# EAGLE board ARM_board (EAGLE 6.3), part 1 of 3
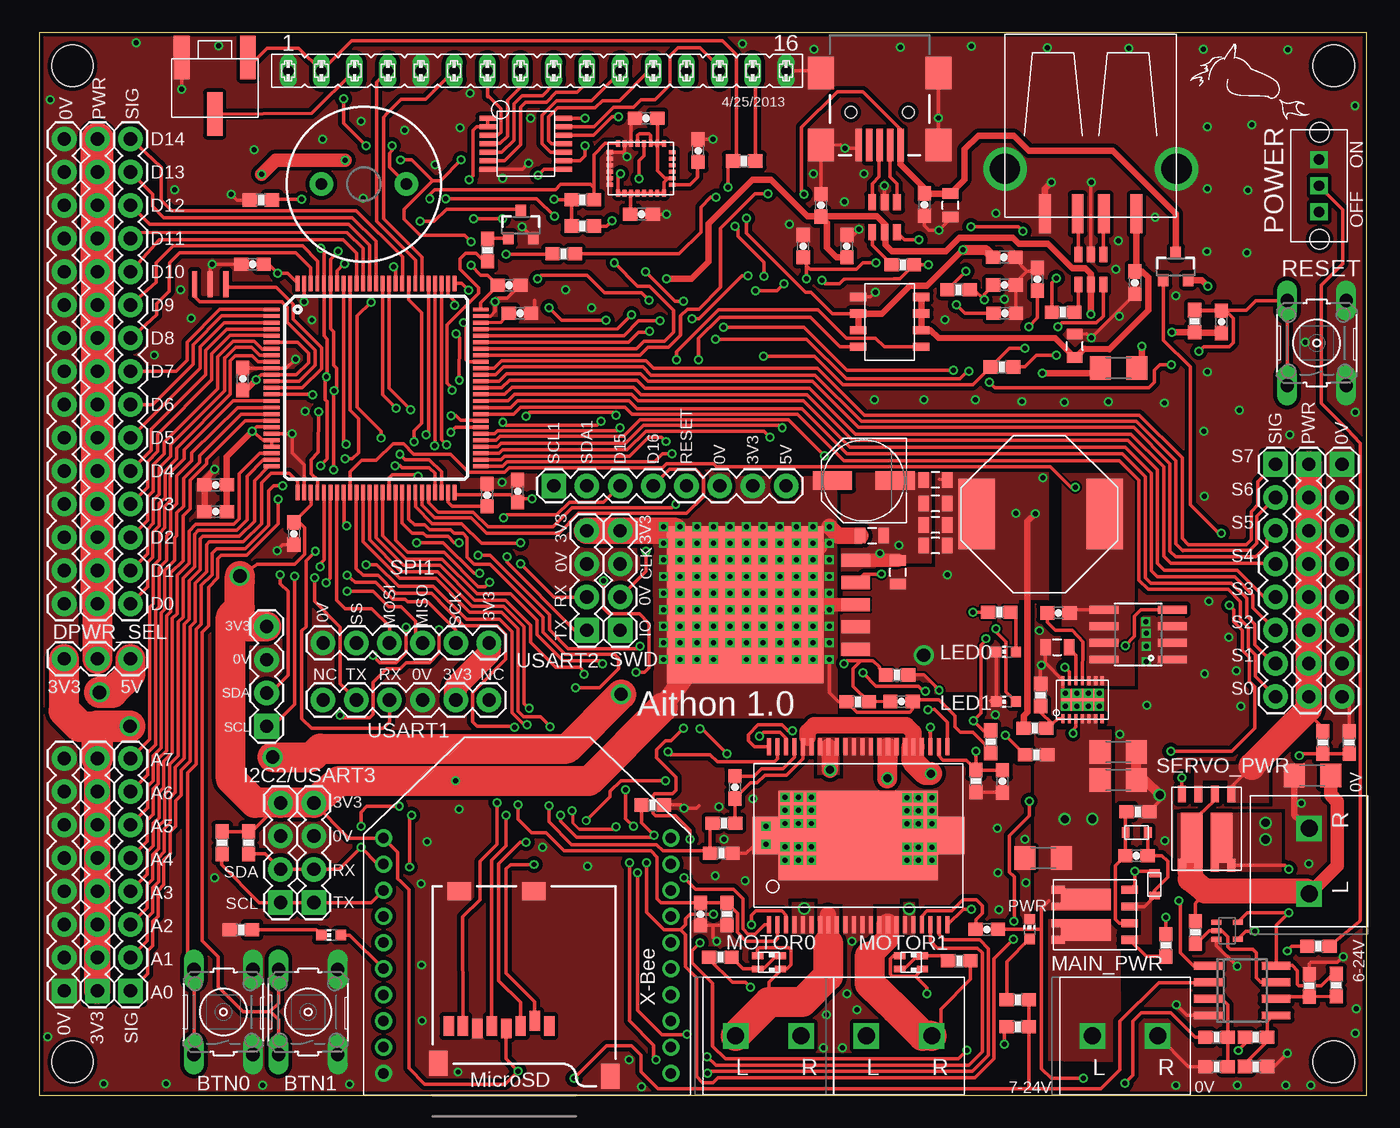
[diagram p0: board, top side]
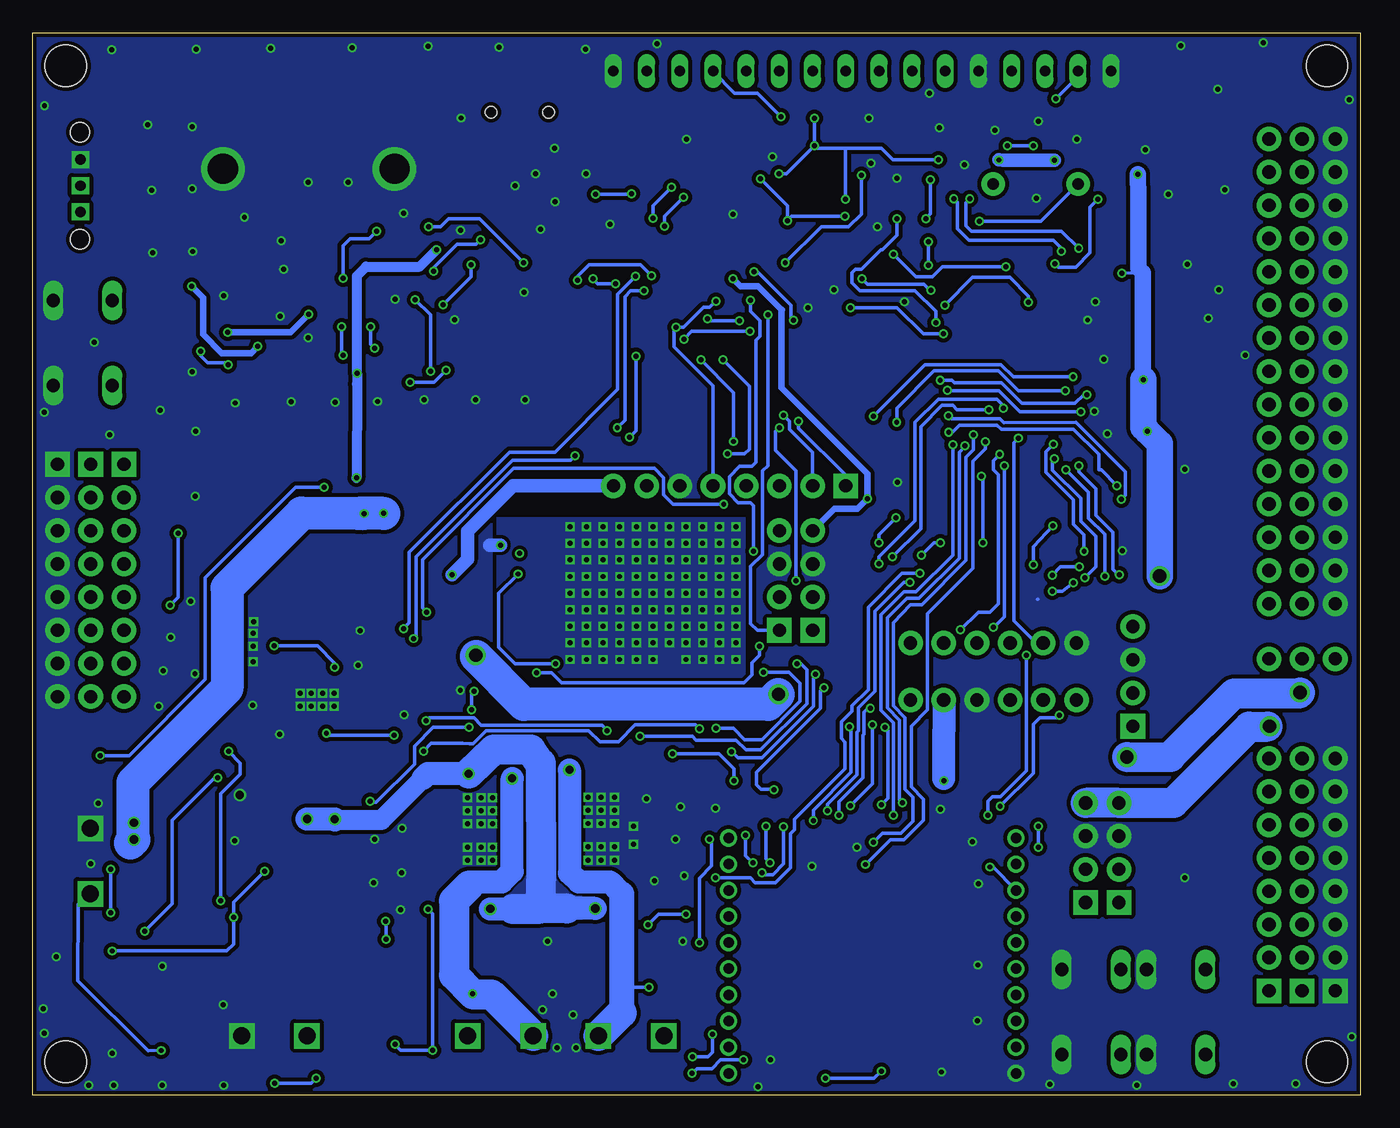
[diagram p1: board, bottom side, seen from below]

Size 101.6 x 81.28 mm. Coordinates in mm from the lower left corner, seen from the top.
Outline: 0,0 101.6,0 101.6,81.28 0,81.28 0,0
Copper layers (1*16): Top 0.035mm / dielectric 1.5mm / Bottom 0.035mm
Design rules "default": minimum track width 6mil, minimum drill 12mil, track to track 6mil, track to pad 6mil, pad to pad 6mil, via to via 6mil, smd to smd 0mil, copper to edge 10mil, drill to drill 10mil, minimum pad ring 10mil, minimum via ring 6mil, stop-mask expansion 2mil, vias tented up to drill 100mil, thermal gap 10mil
Holes 3.17 mm at 2.54,78.74 99.06,78.74 99.06,2.54 2.54,2.54

## Footprints (pad centres in the part's own frame; a part is rotated, then mirrored left to right if it is on the bottom)
B3F-10XX = drill 1.016 long: 1 -3.251,2.261; 2 3.251,2.261; 3 -3.251,-2.261; 4 3.251,-2.261
0805 = smd 0.8 x 1.2: 1 -0.9,0; 2 0.9,0
0603-CAP = smd 1.1 x 1: 1 -0.85,0; 2 0.85,0
1206 = smd 1.6 x 1.8: 1 -1.4,0; 2 1.4,0
PANASONIC_D = smd 3 x 1.4: + 2.4,0; - -2.4,0
1206' = smd 1.6 x 1.8: 1 -0.13,2.54; 2 2.67,2.54
TQFP100 = smd 1.2 x 0.3: 1 -8,6; 2 -8,5.5; 3 -8,5; 4 -8,4.5; 5 -8,4; 6 -8,3.5; 7 -8,3; 8 -8,2.5; 9 -8,2; 10 -8,1.5; 11 -8,1; 12 -8,0.5; 13 -8,0; 14 -8,-0.5; 15 -8,-1; 16 -8,-1.5; 17 -8,-2; 18 -8,-2.5; 19 -8,-3; 20 -8,-3.5; 21 -8,-4; 22 -8,-4.5; 23 -8,-5; 24 -8,-5.5; 25 -8,-6; 51 8,-6; 52 8,-5.5; 53 8,-5; 54 8,-4.5; 55 8,-4; 56 8,-3.5; 57 8,-3; 58 8,-2.5; 59 8,-2; 60 8,-1.5; 61 8,-1; 62 8,-0.5; 63 8,0; 64 8,0.5; 65 8,1; 66 8,1.5; 67 8,2; 68 8,2.5; 69 8,3; 70 8,3.5; 71 8,4; 72 8,4.5; 73 8,5; 74 8,5.5; 75 8,6 | smd 0.3 x 1.2: 26 -6,-8; 27 -5.5,-8; 28 -5,-8; 29 -4.5,-8; 30 -4,-8; 31 -3.5,-8; 32 -3,-8; 33 -2.5,-8; 34 -2,-8; 35 -1.5,-8; 36 -1,-8; 37 -0.5,-8; 38 0,-8; 39 0.5,-8; 40 1,-8; 41 1.5,-8; 42 2,-8; 43 2.5,-8; 44 3,-8; 45 3.5,-8; 46 4,-8; 47 4.5,-8; 48 5,-8; 49 5.5,-8; 50 6,-8; 76 6,8; 77 5.5,8; 78 5,8; 79 4.5,8; 80 4,8; 81 3.5,8; 82 3,8; 83 2.5,8; 84 2,8; 85 1.5,8; 86 1,8; 87 0.5,8; 88 0,8; 89 -0.5,8; 90 -1,8; 91 -1.5,8; 92 -2,8; 93 -2.5,8; 94 -3,8; 95 -3.5,8; 96 -4,8; 97 -4.5,8; 98 -5,8; 99 -5.5,8; 100 -6,8
SO08 = smd 0.6 x 2.2: 1 -1.905,-2.6; 2 -0.635,-2.6; 3 0.635,-2.6; 4 1.905,-2.6; 5 1.905,2.6; 6 0.635,2.6; 7 -0.635,2.6; 8 -1.905,2.6
1X04 = drill 1.016 pad 1.88 square: 1 0,0 | drill 1.016 pad 1.88: 2 2.54,0; 3 5.08,0; 4 7.62,0
1X06 = drill 1.016 pad 1.88: 1 0,0; 2 2.54,0; 3 5.08,0; 4 7.62,0; 5 10.16,0; 6 12.7,0
1X08 = drill 1.016 pad 1.88 square: 1 0,0 | drill 1.016 pad 1.88: 2 2.54,0; 3 5.08,0; 4 7.62,0; 5 10.16,0; 6 12.7,0; 7 15.24,0; 8 17.78,0
1X15 = drill 1.016 pad 1.88: 1 0,0; 2 2.54,0; 3 5.08,0; 4 7.62,0; 5 10.16,0; 6 12.7,0; 7 15.24,0; 8 17.78,0; 9 20.32,0; 10 22.86,0; 11 25.4,0; 12 27.94,0; 13 30.48,0; 14 33.02,0; 15 35.56,0
1X03 = drill 1.016 pad 1.88: 1 0,0; 2 2.54,0; 3 5.08,0
INDUCTOR = smd 2.8 x 5.4: P$1 0,0; P$2 9.8,0
LCD = drill 0.8 long: A 16.51,0; DB0 -3.81,0; DB1 -1.27,0; DB2 1.27,0; DB3 3.81,0; DB4 6.35,0; DB5 8.89,0; DB6 11.43,0; DB7 13.97,0; E -6.35,0; K 19.05,0; R/W -8.89,0; RS -11.43,0; VDD -16.51,0; VO -13.97,0; VSS -19.05,0
CHIP-LED0603 = smd 0.8 x 0.8: A 0,-0.75; C 0,0.75
LED-0606 = smd 0.85 x 0.5: 1 0.875,0.5; 2 -0.875,0.5; 3 0.875,-0.5; 4 -0.875,-0.5
2POS_TERMINAL = drill 1.3 square: L -5,0; R 0,0
POT = smd 1.194 x 3.302: 1 -2.54,0; 2 0,4.318; 3 2.54,0
SOT23-3 = smd 0.8 x 0.9: 1 -0.95,-1; 2 0.95,-1; 3 0,1.1
SO08' = smd 0.61 x 2.21: 1 -1.905,-2.616; 2 -0.635,-2.616; 3 0.635,-2.616; 4 1.905,-2.616; 5 1.905,2.616; 6 0.635,2.616; 7 -0.635,2.616; 8 -1.905,2.616
POWERPAK = smd 1.27 x 0.61: 1 0,2.54; 2 0,1.27; 3 0,0; 4 0,-1.27 | smd 1.016 x 0.61: 5 5.461,-1.27; 6 5.461,0; 7 5.461,1.27; 8 5.461,2.54 | smd 3.81 x 1.651: 9 3.353,1.791; 10 3.353,-0.521
0603-RES = smd 1.1 x 1: 1 -0.85,0; 2 0.85,0
MICRO-SD-SOCKET-PP = smd 0.8 x 1.5: 1 -8.94,10.7; 2 -7.84,10.3; 3 -6.74,10.7; 4 -5.64,10.9; 5 -4.54,10.7; 6 -3.44,10.9; 7 -2.34,10.7; 8 -1.24,10.7 | smd 1.8 x 1.4: CD1 -2.05,0.4; CD2 -7.75,0.4 | smd 1.4 x 1.9: GND1 -13.6,14.55; GND3 -0.45,13.55
BUZZER-12MM = drill 0.9 pad 1.778: + 3.25,0; - -3.25,0
SW = drill 0.8 square: P$1 0,0; P$2 2,0; P$3 -2,0 | hole 1.5: -4.1,-0.04; 4.1,-0.04
HSOP44 = smd 1.3 x 0.3: P$1 -6.85,6.85; P$2 -6.85,6.2; P$3 -6.85,5.55; P$4 -6.85,4.9; P$5 -6.85,4.25; P$6 -6.85,3.6; P$7 -6.85,2.95; P$8 -6.85,2.3; P$9 -6.85,1.65; P$10 -6.85,1; P$11 -6.85,0.35; P$12 -6.85,-0.3; P$13 -6.85,-0.95; P$14 -6.85,-1.6; P$15 -6.85,-2.25; P$16 -6.85,-2.9; P$17 -6.85,-3.55; P$18 -6.85,-4.2; P$19 -6.85,-4.85; P$20 -6.85,-5.5; P$21 -6.85,-6.15; P$22 -6.85,-6.8; P$23 6.8,-6.8; P$24 6.8,-6.15; P$25 6.8,-5.5; P$26 6.8,-4.85; P$27 6.8,-4.2; P$28 6.8,-3.55; P$29 6.8,-2.9; P$30 6.8,-2.25; P$31 6.8,-1.6; P$32 6.8,-0.95; P$33 6.8,-0.3; P$34 6.8,0.35; P$35 6.8,1; P$36 6.8,1.65; P$37 6.8,2.3; P$38 6.8,2.95; P$39 6.8,3.6; P$40 6.8,4.25; P$41 6.8,4.9; P$42 6.8,5.55; P$43 6.8,6.2; P$44 6.8,6.85 | smd 6.85 x 12.2: P$45 0,0 | smd 2.9 x 2: P$46 0,7.1; P$47 0,-7.1
WDFN-14L = smd 0.25 x 0.7: 1 -1.5,-1.45; 2 -1,-1.45; 3 -0.5,-1.45; 4 0,-1.45; 5 0.5,-1.45; 6 1,-1.45; 7 1.5,-1.45; 8 1.5,1.45; 9 1,1.45; 10 0.5,1.45; 11 0,1.45; 12 -0.5,1.45; 13 -1,1.45; 14 -1.5,1.45 | smd 3.3 x 1.7: P$1 0,0
SC70 = smd 0.4 x 0.75: 1 -0.65,-0.825; 2 0,-0.825; 3 0.65,-0.825; 4 0.65,0.825; 5 -0.65,0.825
SOT23-6L = smd 1.2 x 0.6: P$1 -1.1,0.9; P$2 -1.1,-0.05; P$3 -1.1,-1; P$4 1.2,-1; P$5 1.2,-0.05; P$6 1.2,0.9
D2PAK-5 = smd 1 x 2.2: ADJ 1.7,-8.45; EN -1.7,-8.45; GND 3.4,-8.45; VIN -3.4,-8.45; VOUT 0,-8.45 | smd 12 x 12: VOUT_PAD 0,0
LGA-28 = smd 0.5 x 0.3: 1 -2.4,1.25; 2 -2.4,0.75; 3 -2.4,0.25; 4 -2.4,-0.25; 5 -2.4,-0.75; 6 -2.4,-1.25; 15 2.4,-1.25; 16 2.4,-0.75; 17 2.4,-0.25; 18 2.4,0.25; 19 2.4,0.75; 20 2.4,1.25 | smd 0.3 x 0.5: 7 -1.75,-1.9; 8 -1.25,-1.9; 9 -0.75,-1.9; 10 -0.25,-1.9; 11 0.25,-1.9; 12 0.75,-1.9; 13 1.25,-1.9; 14 1.75,-1.9; 21 1.75,1.9; 22 1.25,1.9; 23 0.75,1.9; 24 0.25,1.9; 25 -0.25,1.9; 26 -0.75,1.9; 27 -1.25,1.9; 28 -1.75,1.9
8-SOIC = smd 0.635 x 1.27: 1 -1.27,-1.778; 2 0,-1.778; 3 1.27,-1.778; 4 2.54,-1.778; 5 2.54,3.048; 6 1.27,3.048; 7 0,3.048; 8 -1.27,3.048
TSSOP-14 = smd 1.26 x 0.36: 1 -2.9,1.95; 2 -2.9,1.3; 3 -2.9,0.65; 4 -2.9,0; 5 -2.9,-0.65; 6 -2.9,-1.3; 7 -2.9,-1.95; 8 2.9,-1.95; 9 2.9,-1.3; 10 2.9,-0.65; 11 2.9,0; 12 2.9,0.65; 13 2.9,1.3; 14 2.9,1.95
USB-A-S = smd 3 x 0.9: D+ 3.45,-1; D- 3.45,1; GND 3.45,-3.5; VBUS 3.45,3.5 | drill 2.311: GND@1 0,6.566; GND@2 0,-6.566
USB-MINIB = smd 2.5 x 0.5: D+ 2.5,0; D- 2.5,0.8; GND 2.5,-1.6; ID 2.5,-0.8; VBUS 2.5,1.6 | smd 2.5 x 2: MTN1 -3,4.5; MTN2 2.5,4.5; MTN3 -3,-4.5; MTN4 2.5,-4.5 | hole 0.9: 0,2.2; 0,-2.2
XBEE = drill 0.8 pad 1.27: 1 -11,9; 2 -11,7; 3 -11,5; 4 -11,3; 5 -11,1; 6 -11,-1; 7 -11,-3; 8 -11,-5; 9 -11,-7; 10 -11,-9; 11 11,-9; 12 11,-7; 13 11,-5; 14 11,-3; 15 11,-1; 16 11,1; 17 11,3; 18 11,5; 19 11,7; 20 11,9
RESONATOR = smd 0.4 x 2: 1 -1.2,0; 2 0,0; 3 1.2,0
0603 = smd 0.6 x 0.8: P$1 1.7,0; P$2 0,0

## Placement (x,y rotation side)
BTN0  [B3F-10XX]  14.1,6.35 90 top
BTN1  [B3F-10XX]  20.57,6.35 90 top
C1  10u  [0805]  65.71,40.01 90 top
C3  22u  [0805]  68.58,47.07 180 top
C4  22u  [0805]  68.58,45.26 180 top
C5  22u  [0805]  68.58,43.61 180 top
C6  10u  [0805]  63.74,42.8 0 top
C7  2.2u  [0603-CAP]  34.26,45.9 90 top
C8  0.1u  [0603-CAP]  72.52,12.67 180 top
C9  0.1u  [0603-CAP]  53.24,23.55 270 top
C10  1u  [0603-CAP]  50.6,13.85 270 top
C11  1u  [0603-CAP]  73.71,24 270 top
C12  0.1u  [0603-CAP]  59.82,68.07 90 top
C13  47p  [0603-CAP]  73.89,59.82 0 top
C14  47p  [0603-CAP]  73.86,61.98 0 top
C15  0.1u  [0603-CAP]  73.84,64.11 0 top
C16  0.1u  [0603-CAP]  61.8,64.95 90 top
C17  47p  [0603-CAP]  58.46,64.95 90 top
C18  47p  [0603-CAP]  76.39,62.41 90 top
C21  0.1u  [0603-CAP]  83.86,62.16 270 top
C22  0.1u  [0603-CAP]  67.74,68.12 90 top
C23  10u  [0805]  79.24,57.32 90 top
C24  10u  [0805]  69.72,68.07 90 top
C25  10u  [0603-CAP]  46.44,74.74 180 top
C26  10u  [1206]  82.58,26.24 0 top
C27  22u  [1206]  97.43,24.43 180 top
C28  10u  [1206]  82.58,24.1 0 top
C29  0.1u  [0603-CAP]  83.97,18.31 180 top
C30  10n  [0603-CAP]  90.47,59.16 90 top
C31  22u  [1206]  76.83,18.14 180 top
C32  1u  [0603-CAP]  78,36.88 0 top
C33  10u  [0805]  77.9,34.26 0 top
C34  0.1u  [0603-CAP]  46.09,67.4 0 top
C35  10n  [0603-CAP]  50.42,72.26 90 top
C36  22u  [0805]  68.58,42.04 180 top
C37  2.2u  [0603-CAP]  36.78,59.82 0 top
C38  0.1u  [0603-CAP]  65.99,30.11 180 top
C39  4.7u  [0603-CAP]  15.58,54.79 90 top
C40  100n  [0603-CAP]  16.32,63.57 180 top
C41  100n  [0603-CAP]  35.96,61.96 0 top
C42  100n  [0603-CAP]  19.49,42.96 270 top
C43  100n  [0603-CAP]  36.62,46.21 90 top
C44  220u  [PANASONIC_D]  63.1,47.02 180 top
C46  1u  [0603-CAP]  13.5,44.64 180 top
C47  10n  [0603-CAP]  13.5,46.68 180 top
F1  POLYFUSE  [1206']  83.88,58.16 180 top
IC3  STM32F407VET  [TQFP100]  25.78,54.1 0 top
IC4  LM358D  [SO08]  92.06,8 270 top
J1  USART/I2C  [1X04]  18.47,14.73 90 top
J2  I2C2/USART3  [1X04]  21.01,14.73 90 top
J3  USART2  [1X04]  41.91,35.56 90 top
J4  I2C1  [1X04]  17.4,28.22 90 top
J5  SPI  [1X06]  21.72,34.59 0 top
J6  Bluesmirf  [1X06]  21.72,30.23 0 top
J7  SWD  [1X04]  44.45,35.56 90 top
J8  AGND  [1X08]  1.91,7.98 90 top
J9  APWR  [1X08]  4.45,7.98 90 top
J10  ANALOG  [1X08]  6.99,7.98 90 top
J11  DGND  [1X15]  1.91,37.59 90 top
J12  DPWR  [1X15]  4.45,37.59 90 top
J13  DIGITAL  [1X15]  6.99,37.59 90 top
J14  SGND  [1X08]  99.69,48.26 270 top
J15  SPWR  [1X08]  97.16,48.26 270 top
J16  SERVO  [1X08]  94.61,48.26 270 top
JP1  SHIELD  [1X08]  39.37,46.61 0 top
JP2  DPWR_SEL  [1X03]  1.91,33.38 0 top
L1  2.7u  [INDUCTOR]  81.53,44.45 180 top
LCD  LCD_DISPLAY  [LCD]  38.1,78.36 0 top
LED2  YELLOW  [CHIP-LED0603]  73.99,33.91 90 top
LED3  YELLOW  [CHIP-LED0603]  73.99,30.1 90 top
LED4  RED  [CHIP-LED0603]  75.78,12.7 0 top
LED5  YELLOW  [CHIP-LED0603]  22.33,12.24 90 top
LED6  LED_R/G  [LED-0606]  55.85,10.16 180 top
LED7  LED_R/G  [LED-0606]  66.73,10.16 180 top
MOTOR0  2POS_TERMINAL  [2POS_TERMINAL]  58.29,4.52 0 top
MOTOR1  2POS_TERMINAL  [2POS_TERMINAL]  68.3,4.52 0 top
POT  10K  [POT]  13.44,79.38 180 top
POWER  2POS_TERMINAL  [2POS_TERMINAL]  85.6,4.52 0 top
Q1  Si2301  [SOT23-3]  86.97,63.35 0 top
Q2  BC817  [SOT23-3]  36.86,66.55 0 top
Q3  FDS6670AS  [SO08']  84.1,35.23 90 top
Q4  SI7997DP  [POWERPAK]  88.7,23.04 270 top
Q5  SI7997DP  [POWERPAK]  83.44,14.43 180 top
R1  10  [0603-RES]  53.95,71.46 180 top
R2  100k  [0603-RES]  84.07,21.69 0 top
R3  100k  [0603-RES]  86.21,11.46 270 top
R4  220  [0603-RES]  74.89,7.29 0 top
R5  10k  [0603-RES]  72.81,27.03 270 top
R6  10k  [0603-RES]  74.88,5.22 180 top
R7  10k  [0603-RES]  88.42,59.21 270 top
R8  220  [0603-RES]  52.63,13.85 90 top
R9  220  [0603-RES]  71.68,24.03 90 top
R10  10k  [0603-RES]  90.1,4.41 180 top
R11  10k  [0603-RES]  90.1,2.18 0 top
R18  93.1k  [0603-RES]  52.4,20.8 180 top
R19  10k  [0603-RES]  52.2,18.52 0 top
R20  220  [0603-RES]  73.47,36.95 180 top
R21  220  [0603-RES]  40.13,64.36 180 top
R22  4.7k  [0603-RES]  41.59,68.51 180 top
R23  4.7k  [0603-RES]  41.59,66.49 180 top
R24  4.7k  [0603-RES]  16.03,19.3 90 top
R25  4.7k  [0603-RES]  14,19.3 90 top
R26  10k  [0603-RES]  97.21,8.38 270 top
R27  39k  [0603-RES]  99.26,8.41 90 top
R28  10k  [0603-RES]  93.12,2.18 0 top
R29  39k  [0603-RES]  93.12,4.42 0 top
R31  10k  [0603-RES]  97.89,11.38 0 top
R32  93.1k  [0603-RES]  76.19,28.07 180 top
R33  18k  [0603-RES]  76.63,30.61 270 top
R34  100k  [0603-RES]  76.29,26.04 0 top
R35  220  [0603-RES]  15.43,12.65 0 top
R36  10k  [0603-RES]  88.47,12.45 90 top
R37  2k  [0603-RES]  52.12,10.54 0 top
R38  2k  [0603-RES]  70.41,10.26 180 top
R39  10k  [0603-RES]  34.32,64.64 90 top
R40  93.1k  [0603-RES]  98.22,26.97 270 top
R41  10k  [0603-RES]  100.24,26.97 90 top
R42  10k  [0603-RES]  16.96,68.48 0 top
R43  10k  [0603-RES]  46.94,22.19 180 top
R44  11k  [0603-RES]  65.64,32.14 180 top
R45  18k  [0603-RES]  62.64,30.09 180 top
R46  15  [0603-RES]  70.35,61.62 0 top
R47  15  [0603-RES]  66.09,63.51 0 top
R48  15  [0603-RES]  78.35,59.88 180 top
R49  15  [0603-RES]  73.67,55.7 180 top
RESET  [B3F-10XX]  97.76,57.53 90 top
SD  USD-SOCKETNEW  [MICRO-SD-SOCKET-PP]  30.09,15.99 180 top
SERVO_PWR  2POS_TERMINAL  [2POS_TERMINAL]  97.18,20.4 90 top
SG1  BUZZERPTH  [BUZZER-12MM]  24.84,69.7 0 top
SW1  SW  [SW]  97.94,69.57 90 top
U1  MC33932  [HSOP44]  62.69,19.86 90 top
U2  RT7259  [WDFN-14L]  79.83,30.25 0 top
U3  NC7SZU04  [SC70]  90.91,12.57 270 top
U6  USBLC6-2  [SOT23-6L]  80.53,63.22 270 top
U8  USBLC6-2  [SOT23-6L]  64.74,67.21 270 top
U10  RT9009  [D2PAK-5]  54.03,37.52 90 top
U$1  LSM330DLC  [LGA-28]  46.05,70.9 0 top
U$2  RT9715  [8-SOIC]  64.45,59.79 270 top
U$3  MC74HC164  [TSSOP-14]  37.22,72.78 0 top
USB1  USB-A-S  [USB-A-S]  80.47,70.87 270 top
USB2  USB-MINIB-5PIN  [USB-MINIB]  64.31,75.18 270 top
XB1  XBEE  [XBEE]  37.34,10.67 0 top
Y1  8MHz  [RESONATOR]  13.08,62.03 180 top
ZD1  15V  [0603]  84.84,20.09 180 top
ZD2  15V  [0603]  85.34,15.27 90 top

## Library data of the parts
BTN0 BTN1 RESET = switch-omron; MPN: B3F-1000; OC_FARNELL: 176432; OC_NEWARK: 36M3542
C1 C3-C18 C21-C44 C46 C47 J1-J16 JP1 JP2 Q1-Q3 R1-R11 R18-R29 R31-R49 SD SG1 U3 USB2 = SparkFun
F1 L1 LED6 LED7 MOTOR0 MOTOR1 POT POWER Q4 Q5 SERVO_PWR SW1 U2 U10 U$1-U$3 Y1 ZD1 ZD2 = r_cubed
IC3 U1 U6 U8 = new_parts
IC4 = linear
LCD = arduinoShield
LED2-LED5 = led
USB1 = con-usb-2
XB1 = maxstream; MPN: XBP24-Z7UIT-004; OC_FARNELL: 1751799; OC_NEWARK: 34R5507

## Nets
5V: C1.1 C3.1 C4.1 C5.1 C15.1 C36.1 F1.2 IC4.8 JP1.8 JP2.3 L1.P$2 LCD.VDD POT.1 Q4.7 Q4.8 Q4.9 R1.2 R27.2 R32.2 SG1.+ U3.5 U10.EN U10.VIN U$2.2 U$2.3
+3V3: C6.1 C12.1 C16.1 C25.1 C30.1 C34.1 C38.1 C39.1 C40.1 C41.1 C42.1 C43.1 C44.+ C46.1 C47.1 IC3.6 IC3.11 IC3.19 IC3.21 IC3.22 IC3.28 IC3.50 IC3.75 IC3.100 IC4.2 J1.4 J2.4 J3.4 J4.4 J5.6 J6.5 J7.4 J9.1 J9.2 J9.3 J9.4 J9.5 J9.6 J9.7 J9.8 JP1.7 JP2.1 R4.2 R5.2 R6.1 R7.2 R22.2 R23.2 R24.2 R25.2 R45.2 SD.4 U6.P$5 U8.P$5 U10.VOUT U10.VOUT_PAD U$1.7 U$1.8 U$1.9 U$1.10 U$1.11 U$1.12 U$1.13 U$1.14 U$1.16 U$1.21 U$1.22 U$1.23 U$1.25 U$3.9 U$3.14 XB1.1
ANALOG0: IC3.26 J10.1
ANALOG1: IC3.25 J10.2
ANALOG2: IC3.24 J10.3
ANALOG3: IC3.23 J10.4
ANALOG4: IC3.18 J10.5
ANALOG5: IC3.17 J10.6
ANALOG6: IC3.16 J10.7
ANALOG7: IC3.15 J10.8
BAT_SENSE: IC3.33 R18.2 R19.1
BTN0: BTN0.1 BTN0.2 IC3.57
BTN1: BTN1.1 BTN1.2 IC3.58
BUZZER: IC3.29 R39.1
DIGITAL0: IC3.9 J13.1
DIGITAL1: IC3.8 J13.2
DIGITAL2: IC3.7 J13.3
DIGITAL3: IC3.5 J13.4
DIGITAL4: IC3.4 J13.5
DIGITAL5: IC3.3 J13.6
DIGITAL6: IC3.2 J13.7
DIGITAL7: IC3.1 J13.8
DIGITAL8: IC3.98 J13.9
DIGITAL9: IC3.97 J13.10
DIGITAL10: IC3.91 J13.11
DIGITAL11: IC3.90 J13.12
DIGITAL12: IC3.89 J13.13
DIGITAL13: IC3.88 J13.14
DIGITAL14: IC3.84 J13.15
DIGITAL15: IC3.44 JP1.3
DIGITAL16: IC3.45 JP1.4
GND: BTN0.3 BTN0.4 BTN1.3 BTN1.4 C1.2 C3.2 C4.2 C5.2 C6.2 C7.2 C10.2 C11.2 C12.2 C13.2 C14.2 C15.2 C16.2 C17.2 C18.2 C21.2 C22.1 C23.2 C24.1 C25.2 C26.2 C27.2 C28.2 C31.2 C33.1 C34.2 C35.2 C36.2 C37.2 C39.2 C40.2 C41.2 C42.2 C43.2 C44.- C46.2 C47.2 IC3.10 IC3.20 IC3.27 IC3.74 IC3.99 IC4.4 J1.3 J2.3 J3.3 J4.3 J5.1 J6.4 J7.3 J8.1 J8.2 J8.3 J8.4 J8.5 J8.6 J8.7 J8.8 J11.1 J11.2 J11.3 J11.4 J11.5 J11.6 J11.7 J11.8 J11.9 J11.10 J11.11 J11.12 J11.13 J11.14 J11.15 J14.1 J14.2 J14.3 J14.4 J14.5 J14.6 J14.7 J14.8 JP1.6 LCD.K LCD.R/W LCD.VSS LED2.C LED3.C LED4.C POT.3 POWER.R Q2.2 Q3.1 Q3.2 Q3.3 R2.2 R8.1 R9.1 R11.1 R19.2 R26.1 R28.2 R33.1 R35.1 R41.2 R42.1 R43.1 R44.1 RESET.3 RESET.4 SD.6 SD.CD1 SD.CD2 SD.GND1 SD.GND3 SERVO_PWR.R SW1.P$2 U1.P$10 U1.P$11 U1.P$12 U1.P$13 U1.P$32 U1.P$33 U1.P$34 U1.P$35 U1.P$45 U1.P$46 U1.P$47 U2.14 U2.P$1 U3.3 U6.P$2 U8.P$2 U10.GND U$1.1 U$1.2 U$1.3 U$1.4 U$1.5 U$1.6 U$1.26 U$1.27 U$2.1 U$3.7 USB1.GND USB1.GND@1 USB1.GND@2 USB2.GND USB2.MTN1 USB2.MTN2 USB2.MTN3 USB2.MTN4 XB1.10 Y1.2
I2C1_SCL: IC3.95 J4.1 JP1.1 R23.1 U$1.24
I2C1_SDA: IC3.96 J4.2 JP1.2 R22.1 U$1.28
I2C2_SCL/USART3_TX: IC3.47 J1.1 J2.1 R25.1 XB1.3
I2C2_SDA/USART3_RX: IC3.48 J1.2 J2.2 R24.1 XB1.2
LCD_CLK: IC3.69 U$3.8
LCD_DATA: IC3.67 U$3.1 U$3.2
LCD_E: IC3.81 LCD.E
LCD_RS: IC3.82 LCD.RS
LED0: IC3.46 R20.2
LED1: IC3.85 R21.2
M0_A: IC3.38 U1.P$43
M0_B: IC3.39 U1.P$42
M0_EN: IC3.40 U1.P$1
M0_FAULT: IC3.55 R5.1 U1.P$44
M0_SENSE: C10.1 IC3.35 R8.2 U1.P$2
M1_A: IC3.41 U1.P$20
M1_B: IC3.43 U1.P$21
M1_EN: IC3.42 U1.P$23
M1_FAULT: IC3.56 R6.2 U1.P$22
M1_SENSE: C11.1 IC3.36 R9.2 U1.P$24
M_STANDBY: IC3.37 R43.2 U1.P$3 U1.P$25
MPOWER: C8.1 C9.2 C26.1 C28.1 C31.1 Q5.5 Q5.6 Q5.10 R10.2 R18.1 R34.2 U1.P$4 U1.P$5 U1.P$6 U1.P$17 U1.P$18 U1.P$26 U1.P$27 U1.P$28 U1.P$39 U1.P$40 U2.4 U2.5 U2.6
N$1: POWER.L Q5.7 Q5.8 Q5.9
N$2: C29.2 Q5.2 R2.1 ZD1.P$1
N$3: IC3.94 R42.2
N$4: C37.1 IC3.73
N$5: IC4.3 R10.1 R11.2
N$6: R46.1 U8.P$6
N$7: U8.P$1 USB2.D-
N$8: U8.P$3 USB2.D+
N$9: LED4.A R4.1
N$10: C32.2 L1.P$1 Q3.5 Q3.6 Q3.7 Q3.8 U2.8 U2.9 U2.10
N$11: C35.1 U$1.15
N$12: IC4.5 R28.1 R29.2
N$13: U6.P$3 USB1.D+
N$14: IC4.1 Q1.1
N$15: F1.1 Q1.2
N$16: U6.P$1 USB1.D-
N$17: R32.1 R33.2 U2.1
N$18: LED5.C R35.2
N$19: J12.1 J12.2 J12.3 J12.4 J12.5 J12.6 J12.7 J12.8 J12.9 J12.10 J12.11 J12.12 J12.13 J12.14 J12.15 JP2.2
N$20: C33.2 U2.12
N$21: C21.1 C23.1 U$2.6 U$2.7 U$2.8 USB1.VBUS
N$22: R31.2 SW1.P$1
N$23: C29.1 Q5.1 Q5.3 R3.2 ZD1.P$2 ZD2.P$2
N$24: C7.1 IC3.49
N$25: C32.1 U2.11
N$26: IC4.6 R26.2 R27.1
N$27: IC4.7 R36.1 U3.2
N$28: Q2.3 SG1.-
N$29: LED5.A XB1.6
N$30: Q4.4 U3.4
N$31: LCD.VO POT.2
N$32: C38.2 R44.2 R45.1 U10.ADJ
N$33: R47.1 U8.P$4
N$34: R48.1 U6.P$4
N$35: Q3.4 U2.13
N$36: R49.1 U6.P$6
N$42: LED2.A R20.1
N$43: LED3.A R21.1
N$44: R34.1 U2.3
N$46: IC3.12 Y1.3
N$47: IC3.13 Y1.1
N$49: C9.1 U1.P$41
N$50: C8.2 U1.P$19
N$51: LED6.1 LED6.4 R37.2
N$52: LED7.1 LED7.4 R38.2
N$54: LCD.A R1.1
N$58: LCD.DB0 U$3.3
N$60: LCD.DB1 U$3.4
N$61: LCD.DB2 U$3.5
N$62: LCD.DB3 U$3.6
N$63: LCD.DB4 U$3.10
N$64: LCD.DB5 U$3.11
N$65: Q2.1 R39.2
N$68: Q5.4 R3.1 R31.1 ZD2.P$1
N$70: LCD.DB6 U$3.12
N$71: LCD.DB7 U$3.13
OUT1: LED6.2 LED6.3 MOTOR0.L U1.P$7 U1.P$8 U1.P$9
OUT2: MOTOR0.R R37.1 U1.P$36 U1.P$37 U1.P$38
OUT3: LED7.2 LED7.3 MOTOR1.L U1.P$29 U1.P$30 U1.P$31
OUT4: MOTOR1.R R38.1 U1.P$14 U1.P$15 U1.P$16
RAW_SPWR: C27.1 Q4.2 Q4.5 Q4.6 Q4.10 R29.1 R36.2 SERVO_PWR.L
RESET: C30.2 IC3.14 JP1.5 R7.1 RESET.1 RESET.2
SERVO0: IC3.59 J16.8
SERVO1: IC3.60 J16.7
SERVO2: IC3.61 J16.6
SERVO3: IC3.62 J16.5
SERVO4: IC3.63 J16.4
SERVO5: IC3.64 J16.3
SERVO6: IC3.65 J16.2
SERVO7: IC3.66 J16.1
SERVO_SENSE: IC3.34 R40.2 R41.1
SPI1_MISO: IC3.31 J5.4
SPI1_MOSI: IC3.32 J5.3
SPI1_NSS: IC3.77 J5.2
SPI1_SCK: IC3.30 J5.5
SPI3_MISO: IC3.79 SD.7
SPI3_MOSI: IC3.80 SD.3
SPI3_NSS: IC3.83 SD.2
SPI3_SCK: IC3.78 SD.5
SPWR: J15.1 J15.2 J15.3 J15.4 J15.5 J15.6 J15.7 J15.8 Q4.1 Q4.3 R40.1
SWDCLK: IC3.76 J7.2
SWDIO: IC3.72 J7.1
USART1_RX: IC3.93 J6.3
USART1_TX: IC3.92 J6.2
USART2_RX: IC3.87 J3.2
USART2_TX: IC3.86 J3.1
USB_5V: C22.2 C24.2 IC3.68 Q1.3 USB2.VBUS
USB_DEV_DM: C14.1 IC3.70 R46.2
USB_DEV_DP: C13.1 IC3.71 R47.2
USB_HOST_DM: C18.1 IC3.53 R49.2
USB_HOST_DP: C17.1 IC3.54 R48.2
USB_HOST_EN: IC3.52 U$2.4
USB_HOST_FAULT: IC3.51 U$2.5